# EAGLE board easyMySens-v024 (EAGLE 7.3.0)
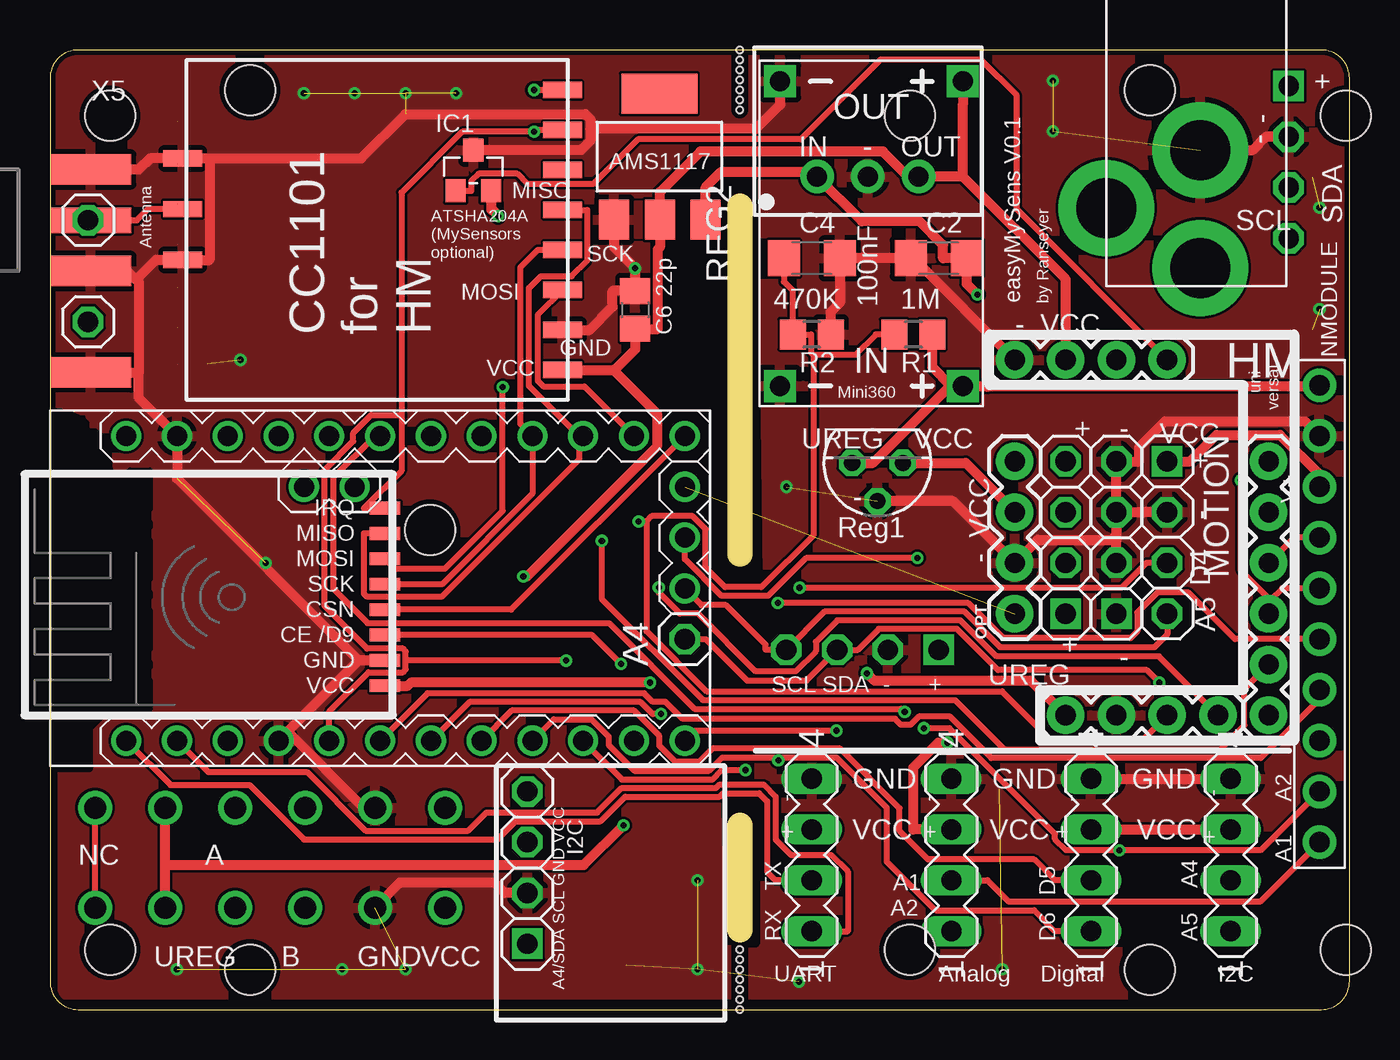
[diagram p0: board, top side]
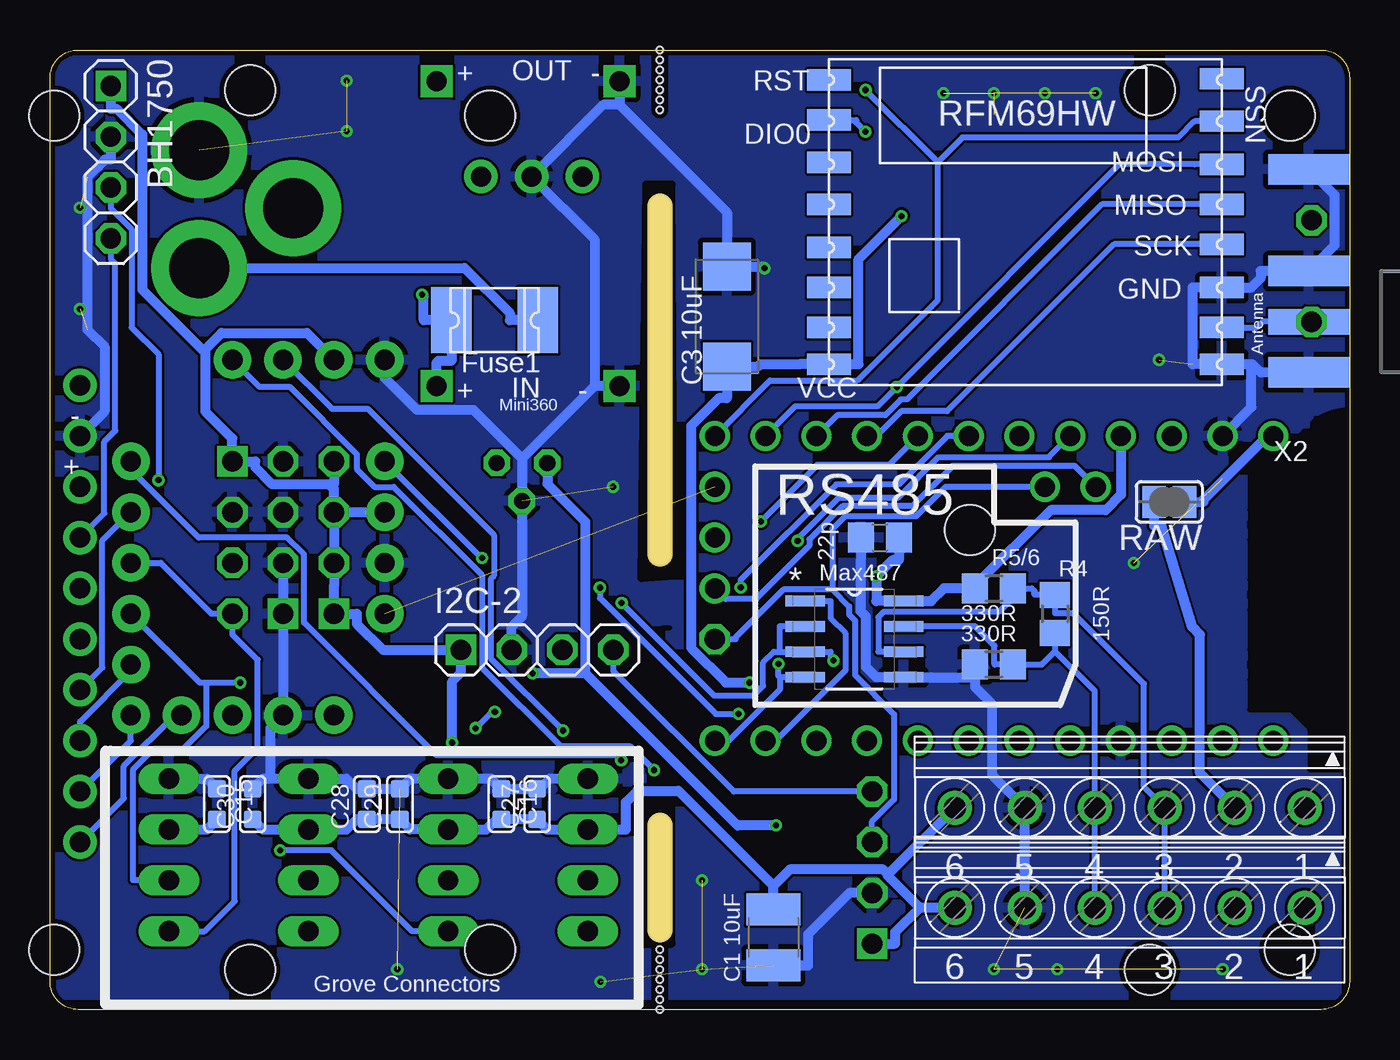
[diagram p1: board, bottom side, seen from below]

Size 65 x 48 mm. Coordinates in mm from the lower left corner, seen from the top.
Outline: 0,46.59 0,1.41 arc90 1.41,0 63.59,0 arc90 65,1.41 65,46.59 arc90 63.59,48 1.41,48 arc90 0,46.59
Copper layers (1*16): Top 0.035mm / dielectric 1.5mm / Bottom 0.035mm
Design rules "dirt_cheap_dirty_boards.v1": minimum track width 5mil, minimum drill 12mil, track to track 5mil, track to pad 5mil, pad to pad 5mil, via to via 5mil, smd to smd 0mil, copper to edge 10mil, drill to drill 10mil, minimum pad ring 10mil, minimum via ring 6mil, stop-mask expansion 2mil, vias tented up to drill 25mil, thermal gap 10mil
Net classes: 0 default: width 0.305 mm; 1 Power: width 0.508 mm
Holes 2.5 mm at 19,24 3,3 3,44.7 64.8,44.7 43,3 64.8,3 43,44.7 10,2 55,2 10,46 55,46
Holes 0.3 mm at 34.5,3 34.5,2.5 34.5,2 34.5,1.5 34.5,1 34.5,0.5 34.5,45 34.5,45.5 34.5,46 34.5,46.5 34.5,47 34.5,47.5 34.5,48 34.5,0
tRestrict: area 33.8,21.6 to 35.4,41.4; area 33.8,3.3 to 35.3,10.4; 18 lines
bRestrict: area 33.8,21.6 to 35.4,41.3; area 33.9,3.3 to 35.4,10.4; 17 lines
Milling: 2 lines

## Footprints (pad centres in the part's own frame; a part is rotated, then mirrored left to right if it is on the bottom)
MA04-1 = drill 1.016 long: 1 -3.81,0; 2 -1.27,0; 3 1.27,0; 4 3.81,0
1X01 = drill 1.016 octagon: 1 0,0
1X04-S = drill 1.016 square: 1 -3.81,0 | drill 1.016 octagon: 2 -1.27,0; 3 1.27,0; 4 3.81,0
SIP3 = drill 1 pad 1.676: 1 -2.54,0; 2 0,0; 3 2.54,0
C1210 = smd 1.6 x 2.7: 1 -1.4,0; 2 1.4,0
C1206 = smd 1.6 x 1.8: 1 -1.4,0; 2 1.4,0
SMC_C = smd 2.4 x 2.4: + -2.5,0; - 2.5,0
C0805 = smd 1.3 x 1.5: 1 -0.95,0; 2 0.95,0
C0603 = smd 0.889 x 0.889: 1 0,0.762; 2 0,-0.762
CC1101_MODULE1_SMD = smd 1.93 x 0.813: ANT 19,5.96; CSN 0,0; GDO0 0,2; GDO2 0,4; GND@0 0,12; GND@1 19,8.5; GND@2 19,3.42; MISO 0,6; MOSI 0,10; SCLK 0,8; VCC 0,14
1812L = smd 2.03 x 3.3: P$1 -2.16,0; P$2 2.16,0
1X04 = drill 1.016 pad 1.88: 1 0,0; 2 2.54,0; 3 5.08,0; 4 7.62,0
1X06 = drill 1.016 pad 1.88: 1 0,0; 2 2.54,0; 3 5.08,0; 4 7.62,0; 5 10.16,0; 6 12.7,0
SOT23 = smd 1.016 x 1.143: 1 -0.889,-1.016; 2 0.889,-1.016; 3 0,1.016
SOT223 = smd 1.499 x 2.007: 1 -2.261,-3.15; 2 0.025,-3.15; 3 2.311,-3.15 | smd 3.81 x 2.007: 4 0,3.15
ARDUINO-PRO-MINI#NP = drill 1: J2.1 -1.27,5.08; J2.2 -3.81,5.08; J3.1 15.24,0; J3.2 15.24,2.54; J3.3 15.24,5.08; J6.1 -12.7,7.62; J6.2 -10.16,7.62; J6.3 -7.62,7.62; J6.4 -5.08,7.62; J6.5 -2.54,7.62; J6.6 0,7.62; J6.7 2.54,7.62; J6.8 5.08,7.62; J6.9 7.62,7.62; J6.10 10.16,7.62; J6.11 12.7,7.62; J6.12 15.24,7.62; J7.1 15.24,-7.62; J7.2 12.7,-7.62; J7.3 10.16,-7.62; J7.4 7.62,-7.62; J7.5 5.08,-7.62; J7.6 2.54,-7.62; J7.7 0,-7.62; J7.8 -2.54,-7.62; J7.9 -5.08,-7.62; J7.10 -7.62,-7.62; J7.11 -10.16,-7.62; J7.12 -12.7,-7.62
NRF24L01+SMD = smd 0.635 x 1.524: CE -1.575,-7.861; CSN -0.305,-7.861; GND -2.845,-7.861; IRQ 4.775,-7.861; MISO 3.505,-7.861; MOSI 2.235,-7.861; SCK 0.965,-7.861; VCC -4.115,-7.861
DUPONT_10 = drill 1.016 pad 1.676: 1 1.27,1.27; 2 3.81,1.27; 3 6.35,1.27; 4 8.89,1.27; 5 11.43,1.27; 6 13.97,1.27; 7 16.51,1.27; 8 19.05,1.27; 9 21.59,1.27; 10 24.13,1.27
R0805 = smd 1.3 x 1.5: 1 -0.95,0; 2 0.95,0
SJ = smd 1.168 x 1.6: 1 -0.762,0; 2 0.762,0
TO92 = drill 0.813 octagon: 1 -1.27,0; 2 0,1.905; 3 1.27,0
DC-DC-STEP-DOWN-MP2307 = drill 1 pad 1.6 square: IN+ -7.62,-4.572; IN- -7.62,4.572; OUT+ 7.62,-4.572; OUT- 7.62,4.572
RFM = smd 2.184 x 1.067: ANT 19.651,2.889; DIO0 0,13.27; DIO1 0,11.143; DIO2 0,9.047; DIO3 0,6.889; DIO4 0,4.889; DIO5 0,2.889; GNDA 19.651,4.889; GNDB 19.651,1.048; MISO 19.651,9.047; MOSI 19.651,11.047; NC 19.651,15.334; NSS 19.651,13.206; RESET 0,15.27; SCK 19.651,7.048; VCC 0,1.048
SOIC127P600X175-8N = smd 1.981 x 0.533: 1 -2.464,1.905; 2 -2.464,0.635; 3 -2.464,-0.635; 4 -2.464,-1.905; 5 2.464,-1.905; 6 2.464,-0.635; 7 2.464,0.635; 8 2.464,1.905
PJ-102A = drill 3 pad 4.8: RING 0.1,-3.39; RING_SW -4.6,-6.29; TIP 0.1,-9.29
1751280 = drill 1.1 pad 1.7: 1 -8.75,-0.1; 2 -5.25,-0.1; 3 -1.75,-0.1; 4 1.75,-0.1; 5 5.25,-0.1; 6 8.75,-0.1
SMA_EDGELAUNCH = smd 4.064 x 1.524: GND@1 2.032,-2.54; GND@2 2.032,2.54 | smd 4.064 x 1.524 bottom: GND@3 2.032,2.54; GND@4 2.032,-2.54 | smd 4.064 x 1.27: P 2.032,0

## Placement (x,y rotation side)
A0  DIP Grove  [MA04-1]  45.09,7.73 90 top
A4  [1X01]  31.75,18.53 90 top
ANT  [1X01]  1.91,39.48 0 top
ANT1  [1X01]  1.91,34.41 0 top
BH1750  [1X04-S]  61.96,42.39 270 bottom
BOOST  R-78C1.8-1.0  [SIP3]  40.91,41.67 0 top
C1  10uF  [C1210]  28.81,3.6 270 bottom
C2  0.1uF  [C1206]  44.45,37.58 180 top
C3  10uF  [SMC_C]  31.14,34.67 90 bottom
C4  0,1uF  [C1206]  38.1,37.58 180 top
C6  22pF  [C0805]  29.27,35 270 top
C10  22p  [C0805]  23.5,23.61 0 bottom
C15  10uF  [C0603]  56.64,10.27 0 bottom
C16  100nF  [C0603]  42.42,10.27 0 bottom
C27  10uF  [C0603]  40.64,10.27 180 bottom
C28  100nF  [C0603]  49.15,10.27 180 bottom
C29  10uF  [C0603]  47.5,10.27 180 bottom
C30  100nF  [C0603]  54.86,10.27 180 bottom
CC0  CC1101  [CC1101_MODULE1_SMD]  25.64,46 180 top
D7  DIP Grove  [MA04-1]  52.07,7.73 90 top
F1  1812L  [1812L]  42.76,34.48 0 bottom
HM1  [1X04]  50.8,14.72 0 top
HM2  [1X06]  60.96,14.72 90 top
HM3  [1X04]  48.26,32.5 0 top
I2C-1  [1X04-S]  23.88,7.1 90 top
I2C-2  [1X04-S]  40.64,17.99 0 bottom
I2C.  DIP Grove  [MA04-1]  59.05,7.73 90 top
IC1  ATSHA204A  [SOT23]  21.18,41.97 0 top
IC2  REG1117  [SOT223]  30.48,42.66 0 top
JP1  [1X04-S]  53.34,23.61 90 top
JP3  [1X04-S]  50.8,23.61 90 top
M1  ARDUINO-PRO-MINI-3.3V#NP  [ARDUINO-PRO-MINI#NP]  16.51,21.07 0 top
M2  NRF24L01+SMD  [NRF24L01+SMD]  8.89,20.31 90 top
MOTION  [1X04-S]  55.88,23.61 270 top
NMODULE  CONNECTOR_10DUPONT  [DUPONT_10]  64.77,7.1 90 top
OPT  [1X04]  48.26,19.8 90 top
R1  1M  [R0805]  43.18,33.77 180 top
R2  470K  [R0805]  38.1,33.77 180 top
R4  150R  [R0805]  14.73,19.8 270 bottom
R5  330R  [R0805]  17.78,21.07 0 bottom
R6  330R  [R0805]  17.78,17.26 180 bottom
RAW  [SJ]  9.02,25.39 180 bottom
REG1  LP2950Z  [TO92]  41.39,27.34 180 top
REG2  STEP-DWN-MP2307  [DC-DC-STEP-DOWN-MP2307]  41.09,38.81 90 top
RFM69W  RFM69HW  [RFM]  26.04,31.23 0 bottom
RS485  MAX487ECSA+  [SOIC127P600X175-8N]  24.77,18.53 0 bottom
U$3  2.1MMJACKTHM  [PJ-102A]  57.44,46.39 0 top
UART  DIP Grove  [MA04-1]  38.1,7.73 90 top
X1  1751280  [1751280]  11,10 180 bottom
X2  [SMA_EDGELAUNCH]  0,34.41 180 bottom
X3  1751280  [1751280]  11,5 180 bottom
X5  [SMA_EDGELAUNCH]  0,39.48 0 top

## Library data of the parts
A0 D7 I2C. UART = con-lstb; OC_FARNELL: unknown; OC_NEWARK: unknown
A4 ANT ANT1 = pinhead
BH1750 I2C-1 I2C-2 JP1 JP3 MOTION = pinhead-2
BOOST = dc-dc-converter
C1-C4 C6 C10 R1 R2 R4-R6 = rcl
C15 C16 C27-C30 = Discrete-new
CC0 M2 = wireless
F1 = ptc-littlefuse
HM1 HM3 OPT = SparkFun-Connectors; PROD_ID: CONN-09696
HM2 = SparkFun-Connectors; PROD_ID: CONN-08437
IC1 = Sensor
IC2 = burr-brown; MPN: REG1117; OC_FARNELL: 1097566; OC_NEWARK: 14P6981
M1 REG2 = diy-modules
NMODULE = TD-MySensors
RAW = jumper
REG1 = linear
RFM69W = hoperf
RS485 = Maxim_By_element14_Batch_1; MPN: MAX487ECSA+; OC_FARNELL: 9724532; OC_NEWARK: 68K4803; PACKAGE: SOIC-8; SUPPLIER: Maxim
U$3 X2 X5 = adafruit
X1 X3 = con-phoenix-350; MPN: 1751280; OC_FARNELL: unknown; OC_NEWARK: 27R1765

## Nets
3.3V [Power]: C3.+ IC1.2 M2.VCC RFM69W.VCC
A: R4.1 R5.2 RS485.6 X1.3 X3.3
A0: C4.2 HM1.3 M1.J6.8 R1.2 R2.2
A1: A0.2 HM1.4 M1.J6.7 NMODULE.1
A2: A0.1 HM2.1 M1.J6.6 NMODULE.2
A3: HM2.2 M1.J6.5 NMODULE.3
A4: A4.1 BH1750.3 HM2.3 I2C-1.3 I2C-2.3 I2C..2 M1.J2.1 NMODULE.6
A5: BH1750.4 HM2.4 I2C-1.4 I2C-2.4 I2C..1 M1.J2.2 M1.J3.1 MOTION.4 NMODULE.7
A6: M1.J3.2 OPT.4
A7: M1.J3.3 OPT.1
ANT0: ANT.1 CC0.ANT X5.P
ATSHA_D7: HM3.4 IC1.1 M1.J7.3
B: R4.2 R6.1 RS485.7 X1.4 X3.4
CSN: CC0.CSN M1.J6.12 M2.CSN RFM69W.NSS
D3: HM2.5 M1.J7.7 NMODULE.4
D4: M1.J7.6 MOTION.3
D5: D7.2 M1.J7.5
D6: D7.1 HM2.6 M1.J7.4
D8: M1.J7.2 RS485.1
D9: HM3.3 M1.J7.1 M2.CE RS485.4
FREE: X1.1 X3.1
GND [Power]: A0.4 BH1750.2 BOOST.2 C1.2 C2.2 C3.- C4.1 C6.1 C10.1 C15.1 C16.1 C27.2 C28.2 C29.2 C30.2 CC0.GND@0 CC0.GND@1 CC0.GND@2 D7.4 HM1.2 HM3.1 I2C-1.2 I2C-2.2 I2C..4 IC1.3 IC2.1 JP1.1 JP1.2 JP1.3 JP1.4 M1.J6.2 M1.J7.9 M2.GND MOTION.2 NMODULE.9 OPT.2 R2.1 R6.2 REG1.2 REG2.IN- REG2.OUT- RFM69W.GNDA RFM69W.GNDB RS485.5 U$3.RING UART.4 X1.5 X2.GND@1 X2.GND@2 X2.GND@3 X2.GND@4 X3.5 X5.GND@1 X5.GND@2 X5.GND@3 X5.GND@4
IN [Power]: F1.P$2 U$3.TIP
IRQ: CC0.GDO0 M1.J7.8 M2.IRQ NMODULE.5 RFM69W.DIO0 RS485.2 RS485.3
MISO: CC0.MISO M1.J6.10 M2.MISO RFM69W.MISO
MOSI: CC0.MOSI M1.J6.11 M2.MOSI RFM69W.MOSI
N$16: ANT1.1 RFM69W.ANT X2.P
RAW [Power]: M1.J6.1 RAW.1
RESET: M1.J7.10
RX: M1.J7.11 UART.1
SCK: CC0.SCLK M1.J6.9 M2.SCK RFM69W.SCK
TX: M1.J7.12 UART.2
UREG [Power]: BOOST.1 C2.1 F1.P$1 HM1.1 IC2.3 NMODULE.10 R1.1 RAW.2 REG1.3 REG2.IN+ X1.2 X3.2
VCC [Power]: A0.3 BH1750.1 BOOST.3 C1.1 C6.2 C10.2 C15.2 C16.2 C27.1 C28.1 C29.1 C30.1 CC0.VCC D7.3 HM3.2 I2C-1.1 I2C-2.1 I2C..3 IC2.2 JP3.1 JP3.2 JP3.3 JP3.4 M1.J6.4 MOTION.1 NMODULE.8 OPT.3 R5.1 REG1.1 REG2.OUT+ RS485.8 UART.3 X1.6 X3.6

## Tracks (layer width: path | path; a pad name or v marks a point on that pad's centre or on a via)
3.3V  (via drill 0.3 pad 0.61)
  Top 0.508: v30.02,16.35 18.05,16.35 17.89,16.19 M2.VCC | IC1.2 22.06,40.01 22.11,40.01 v22.42,39.69
  Bottom 0.508: v30.02,16.35 31.2,16.35 32.94,18.09 32.94,29.19 31.54,30.59 31.14,30.59 C3.+ 29.56,32.17 29.45,32.28 27.51,32.28 26.61,32.28 RFM69W.VCC 24.56,32.28 24.56,37.55 v22.42,39.69
A
  Bottom 0.305: RS485.6 23.57,17.9 23.57,19.62 23.31,19.89 17.55,19.89 16.36,21.07 | 16.36,21.07 15.9,21.07 15.76,20.93 15.76,20.75 R4.1 14.73,19.82 13.8,19.82 10.28,16.3 10.28,11.13 X1.3 X3.3 | R5.2 16.36,21.07
A0  (via drill 0.3 pad 0.61)
  Top 0.305: 29.83,24.42 29.83,18.92 32.84,15.91 47.62,15.91 50.03,13.5 54.66,13.5 HM1.3 | 29.83,24.42 v29.45,24.42 | 38.18,32.74 38.18,23.72 35.59,21.13 33.77,21.13 32.8,22.1 32.8,24.03 32.14,24.68 30.1,24.68 29.83,24.42 | 38.18,32.74 38.08,32.84 38.08,33.77 R2.2 37.15,35.95 36.7,36.4 C4.2 | 38.18,32.74 40.27,32.74 41.3,33.77 R1.2
  Bottom 0.305: M1.J6.8 23.04,27.24 26.62,27.24 v29.45,24.42
A1  (via drill 0.3 pad 0.61)
  Top 0.305: HM1.4 55.47,17.67 47.34,17.67 45.54,19.47 39.38,19.47 38.3,18.4 38.3,17.92 37.3,16.91 35.3,16.91 32.41,19.8 31.5,19.8 30.45,20.85 v30.45,21.12 | A0.2 46.89,6.47 47.95,5.4 60.53,5.4 NMODULE.1
  Bottom 0.305: NMODULE.1 61.31,10.56 61.31,12.18 58.76,14.72 HM1.4 | M1.J6.7 20.12,28.69 22.54,26.27 25.67,26.27 30.45,21.48 v30.45,21.12
A2  (via drill 0.3 pad 0.61)
  Top 0.305: M1.J6.6 16.25,28.69 14.17,26.6 14.17,21.05 15.89,19.33 27.96,19.33 32.24,15.05 42.59,15.05 v42.75,14.89 | v43.71,14.07 44.99,14.07 50.27,8.79 50.27,8.52 50.83,7.96 v53.49,7.96 60.55,7.96 NMODULE.2
  Bottom 0.305: v43.71,14.07 42.95,14.83 42.8,14.83 v42.75,14.89 | v53.49,7.96 50.93,7.96 46.89,3.92 A0.1 | NMODULE.2 60.96,13.45 HM2.1
A3  (via drill 0.3 pad 0.61)
  Top 0.305: v27.6,23.45 27.6,20.54 32.66,15.48 45.26,15.48 47.73,13.02 58.53,13.02 59.74,14.23 59.74,16.04 HM2.2
  Bottom 0.305: v27.6,23.45 27.6,23.55 25.54,25.61 22.57,25.61 20.56,27.63 15.03,27.63 M1.J6.5 | NMODULE.3 63.5,14.39 60.96,16.93 HM2.2
A4  (via drill 0.3 pad 0.61)
  Top 0.305: v55.49,16.35 54.86,16.98 47.42,16.98 45.36,19.04 41.46,19.04 40.41,17.99 I2C-2.3 37.84,16.46 34.86,16.46 32.79,18.53 A4.1 | 61.04,20.49 59.57,21.95 v59.57,26.48 | NMODULE.6 61.63,21.07 61.04,20.49 | 61.04,20.49 61.04,19.88 HM2.3
  Bottom 0.305: 57.18,16.35 57.18,14.18 58.33,13.02 59.81,13.02 60.86,11.98 60.86,6.47 I2C..2 | HM2.3 57.51,16.35 57.18,16.35 | 57.18,16.35 | 57.18,16.35 v55.49,16.35 | v59.57,26.48 59.57,32.78 60.92,34.12 60.92,39.04 61.96,40.08 BH1750.3 | 25.87,21.01 25.03,20.17 25.03,19.75 24.74,19.45 24.74,16.73 22.78,14.77 22.78,10.51 23.88,9.41 I2C-1.3 | M1.J2.1 20.2,26.15 21.69,24.66 25.25,24.66 25.87,24.04 25.87,21.01 | 25.87,21.01 28.32,21.01 30.71,18.62 30.71,18.53 A4.1
A5
  Top 0.305: M1.J3.1 32.58,20.24 33.8,20.24 35.79,18.25 35.79,17.99 I2C-2.4 38.74,19.9 45.75,19.9 47.53,18.12 55.25,18.12 55.88,18.76 MOTION.4 | NMODULE.7 62.23,23.61 HM2.4
  Bottom 0.305: I2C..1 57.25,3.92 55.75,5.42 55.75,11.94 54.61,13.09 54.61,17.49 55.88,18.76 MOTION.4 56.92,19.8 59.46,22.34 HM2.4 | M1.J2.2 13.74,27.2 19.85,27.2 21.86,25.18 25.36,25.18 27.01,23.52 27.01,23.2 29.68,20.53 31.21,20.53 M1.J3.1 | I2C-1.4 30.79,10.91 36.83,16.95 I2C-2.4 | BH1750.4 61.96,37.54 61.73,37.31 61.73,28.95 62.28,28.41 62.28,24.83 NMODULE.7
A6  (via drill 0.3 pad 0.61)
  Top 0.305: v43.39,22.59 37.81,22.59 35.92,20.69 33.59,20.69 31.75,22.53 M1.J3.2
  Bottom 0.305: OPT.4 43.42,22.59 v43.39,22.59
A7  (1 unrouted)
ANT0
  Top 0.305: ANT.1 X5.P 4.34,39.48 4.9,40.04 CC0.ANT
ATSHA_D7  (via drill 0.3 pad 0.61)
  Top 0.305: M1.J7.3 28.61,11.51 33.13,11.51 33.6,11.98 v34.79,11.98 | IC1.1 21.07,40.96 21.07,41.45 21.43,41.81 23.38,41.81 23.9,41.3 27.17,41.3 29.4,43.53 37.56,43.53 41.55,47.52 46.57,47.52 48.35,45.73 48.35,40.03 HM3.4
  Bottom 0.305: HM3.4 54.53,31.16 53.02,31.16 49.65,27.78 49.65,27.04 48.77,26.15 47.81,26.15 43.39,21.73 43.39,17.1 39.47,13.18 35.99,13.18 v34.79,11.98
B
  Bottom 0.305: RS485.7 18.73,19.16 17.76,18.19 17.76,17.26 R6.1 15.39,17.26 14.73,17.92 | R4.2 14.73,17.92 | 14.73,17.92 12.75,15.94 X1.4 X3.4
CSN  (via drill 0.3 pad 0.61)  (1 unrouted)
  Top 0.305: M1.J6.12 23.06,20 M2.CSN | v24.2,46 24.39,46 CC0.CSN
  Bottom 0.305: 20.6,42.39 v24.2,46 | M1.J6.12 28.98,31.47 24.62,31.47 20.6,35.49 20.6,42.39 | 20.6,42.39 19.37,43.62 8.57,43.62 7.75,44.44 RFM69W.NSS
D3
  Top 0.305: NMODULE.4 63.5,15.53 60.55,12.59 47.08,12.59 45.01,14.66 43.45,14.66 43.04,14.25 42.56,14.25 42.27,14.54 31.64,14.54 30.78,15.4 30.14,15.4 29.72,15.82 18.88,15.82 M1.J7.7
  Bottom 0.305: NMODULE.4 62.38,17.11 62.38,23.46 HM2.5
D4  (via drill 0.3 pad 0.61)
  Top 0.305: v30.56,14.78 30.15,14.78 29.54,15.39 20.99,15.39 M1.J7.6 | v37.5,21.1 53.6,21.1 54.84,22.34 MOTION.3
  Bottom 0.305: v37.5,21.1 37.5,20.58 31.7,14.78 v30.56,14.78
D5
  Top 0.305: M1.J7.5 23.09,14.95 29.21,14.95 30.48,13.69 30.48,13.19 31.3,12.38 32.47,12.38 33.15,13.05 39.51,13.05 42.49,10.07 42.49,8.94 43.92,7.51 49.23,7.51 50.27,6.47 D7.2
D6  (via drill 0.3 pad 0.61)
  Top 0.305: 36.43,12.61 39.34,12.61 41.85,10.1 41.85,7.41 44.29,4.97 49.23,4.97 50.27,3.92 D7.1 | M1.J7.4 25.2,14.52 27.09,14.52 27.94,13.66 27.94,13.23 29.23,11.94 32.95,11.94 33.62,12.61 36.43,12.61 | 36.43,12.61 v36.43,12.47
  Bottom 0.305: v36.43,12.47 36.68,12.72 45.66,12.72 52.3,19.35 52.3,22.78 53.13,23.61 57.56,23.61 60.96,27.01 HM2.6
D8
  Bottom 0.305: RS485.1 25.96,20.44 25.96,19.57 25.22,18.84 25.22,16.95 28.72,13.45 M1.J7.2
D9  (via drill 0.3 pad 0.61)
  Top 0.305: v28.57,17.29 27.12,18.73 M2.CE | M1.J7.1 32.25,13.95 v39.34,13.95
  Bottom 0.305: 28.5,16.62 28.57,16.7 v28.57,17.29 | 28.5,16.62 28.5,16.01 31.06,13.45 M1.J7.1 | HM3.3 50.9,30.06 49.12,30.06 42.8,23.74 42.8,21.69 42.96,21.53 42.96,17.56 v39.34,13.95 | RS485.4 28.5,16.62
FREE
  Top 0.305: X3.1 X1.1
GND  (via drill 0.3, 0.3 pad 0.61)  (20 unrouted)
  Top 0.508: HM3.1 43.18,37.58 C2.2 C4.1 39.5,35.35 39.05,34.9 R2.1 | NMODULE.9 62.76,29.43 55.78,29.43 54.48,28.13 54.48,27.42 JP1.4 JP1.3 | 27.03,44.06 27.03,43.46 26.57,42.99 IC1.3 | 7.98,42.58 15.57,42.58 17.78,44.79 26.78,44.79 27.03,44.54 27.03,44.06 | 27.03,44.06 35.32,44.06 36.51,45.25 REG2.OUT- | 7.98,42.58 7.82,42.58 CC0.GND@2 5,42.58 4.45,42.03 X5.GND@3 | 7.98,42.58 7.98,37.5 CC0.GND@1 5.29,37.5 4.31,36.52 | 4.31,36.52 4.45,36.38 4.45,31.87 | 4.31,36.52 4.29,36.52 3.86,36.94 X5.GND@4 | 4.45,31.87 4.45,30.59 M1.J6.2 6.35,26.56 15.45,17.47 | X2.GND@3 4.45,31.87 | BH1750.2 60.82,43.66 60.16,43 U$3.RING | JP1.3 54.74,24.88 MOTION.2 | CC0.GND@0 26.98,34 28.14,35.16 28.14,35.95 C6.1 v29.27,37.08 28.22,38.13 IC2.1 | 11.88,13.91 M1.J7.9 | 15.45,17.47 11.88,13.91 | X1.5 15.69,10.1 11.88,13.91 | 15.45,17.47 15.45,17.46 15.92,17.46 M2.GND | I2C-1.2 22.73,5.83 22.21,6.35 17.5,6.35 X3.5 | D7.4 I2C..4 | JP1.3 53.34,23.74 53.26,23.65 53.26,23.49 | JP1.2 53.34,23.48 53.26,23.48 53.26,23.49 | 53.26,23.49 49.41,23.49 OPT.2 45.16,25.44 REG1.2
  Bottom 0.508: 46.99,11.55 A0.4 42.93,11.55 C16.1 C27.2 40.51,11.04 40.01,11.55 UART.4 | 46.99,11.55 C29.2 C28.2 49.66,11.04 50.16,11.55 D7.4 53.98,11.55 | 46.99,11.55 | 37.76,31.2 37.76,38.53 BOOST.2 37.33,45.25 36.51,45.25 | 37.76,31.2 41.39,27.57 | REG2.IN- 37.76,31.2 | I2C..4 57.15,11.55 | 57.15,11.55 | 57.15,11.55 C15.1 | 41.39,27.57 REG1.2 41.39,24.39 41.39,19.65 41.91,19.13 I2C-2.2 | HM3.1 48.26,31.61 46.66,30.01 43.83,30.01 41.39,27.57 | BH1750.2 61.96,42.52 62.25,42.52 63.13,41.63 63.13,34.01 62.27,33.15 62.27,29.92 NMODULE.9 | 36.51,45.25 31.14,39.89 C3.- 29.36,37.17 v29.27,37.08 | 36.51,45.25 36.51,45.71 REG2.OUT- | X5.GND@3 0.76,40.75 0.76,38.22 X5.GND@4 4.45,36.94 4.45,36.58 4.91,36.12 RFM69W.GNDA 7.86,36.12 7.86,32.28 RFM69W.GNDB 4.91,32.28 | 53.98,11.55 54.36,11.55 C30.2 | 53.98,11.55 53.98,14.09 HM1.2 JP1.1 JP1.2 | 18.73,16.62 20.93,16.62 RS485.5 22.95,16.62 23.67,16.62 24.19,17.14 24.19,19.66 24.45,19.92 24.45,22.48 C10.1 | C1.2 27.08,2.2 27.08,3.77 25.02,5.83 I2C-1.2 | 18.73,16.62 18.73,16.13 17.86,15.26 17.86,11.71 X1.5 X3.5 | R6.2 18.73,16.62 | 4.91,32.28 4.86,32.28 4.45,31.87 X2.GND@3 | M1.J6.2 4.91,30.13 4.91,32.28
  other vias: 12.7,45.83 15.24,45.83 17.78,45.83 20.32,45.83 9.53,32.5 10.79,22.34 6.35,2.02 14.61,2.02 17.78,2.02 32.38,2.02 32.38,6.47 37.47,1.38 47.62,2.02 36.83,26.15 50.16,46.47 50.16,43.93 63.5,40.12 63.5,35.04
  pour Bottom: 0.64,0.75 0.64,12.18 3.17,14.72 5.08,14.72 5.08,26.78 3.17,26.78 1.91,29.96 0,29.96 0,46.47 1.27,47.74 64.77,47.74 65.41,0.75
  pour Top: 0.64,0.75 0.64,12.18 3.17,14.72 5.08,14.72 5.08,26.78 3.17,26.78 1.91,29.96 0,29.96 0,46.47 1.27,47.74 64.77,47.74 65.41,0.75
IN
  Bottom 0.508: F1.P$2 41.99,34.48 41.99,34.83 44.26,37.1 U$3.TIP
IRQ  (via drill 0.3 pad 0.61)
  Top 0.305: NMODULE.5 59.27,18.53 56.95,20.86 55.38,20.86 54.38,19.86 54.38,18.9 54.06,18.58 47.68,18.58 45.93,20.34 v36.4,20.34 | 17.8,17.45 17.8,17.91 17.65,18.06 15.86,18.06 13.73,20.19 13.73,26.99 15.17,28.43 15.17,28.85 16.06,29.74 17.58,29.74 | M1.J7.8 13.97,14.9 15.94,16.87 17.65,16.87 17.8,17.01 17.8,17.45 | v25.81,17.45 17.8,17.45 | 17.58,29.74 17.58,26.95 15.71,25.08 M2.IRQ | 17.58,29.74 17.58,40.87 20.61,43.91 v24.22,43.91 24.3,43.91 24.39,44 CC0.GDO0
  Bottom 0.305: v36.4,20.34 31.78,15.71 29.81,15.71 29.33,16.19 29.33,17.35 28.79,17.9 28.5,17.9 | v25.81,17.45 25.96,17.61 25.96,17.9 RS485.3 28.5,17.9 | 28.5,17.9 28.5,19.16 RS485.2 | RFM69W.DIO0 24.66,44.5 24.66,44.35 v24.22,43.91
MISO  (1 unrouted)
  Top 0.305: 26.46,28.69 26.46,27.52 19.58,20.64 15.86,20.64 15.71,20.79 15.71,23.81 M2.MISO | 26.46,28.69 23.96,31.19 23.96,36.09 24.55,36.69 26.1,36.69 26.88,37.47 26.88,40 CC0.MISO | M1.J6.10 26.46,28.69
  Bottom 0.305: RFM69W.MISO 12.38,40.28 22.14,30.52 22.45,30.52 23.22,29.74 25.62,29.74 M1.J6.10
MOSI  (via drill 0.3 pad 0.61)  (1 unrouted)
  Top 0.305: M2.MOSI 17.24,22.06 19.76,22.06 22.65,24.94 v22.65,31.14 | CC0.MOSI 24.39,34.75 24.39,31.46 24.68,31.17 26.73,31.17 M1.J6.11
  Bottom 0.305: M1.J6.11 27.73,30.17 23.62,30.17 v22.65,31.14 11.51,42.28 7.75,42.28 RFM69W.MOSI
N$16  (1 unrouted)
  Bottom 0.305: ANT1.1 X2.P 4.34,34.41 4.63,34.12 RFM69W.ANT
RAW
  Bottom 0.508: RAW.1 7.29,25.39 7.29,25.51 4.11,28.69 M1.J6.1
RX
  Top 0.305: M1.J7.11 7.91,11.89 12.86,11.89 15.8,8.94 20.92,8.94 21.83,9.86 27.37,9.86 28.59,11.08 33.31,11.08 33.49,11.26 35.7,11.26 36.3,10.66 36.3,8.51 37.07,7.73 39.07,7.73 39.9,6.9 39.9,3.92 UART.1
SCK  (1 unrouted)
  Top 0.305: M2.SCK 19.6,21.27 24.13,25.8 M1.J6.9 23.53,29.29 23.53,37.14 24.39,38 CC0.SCLK
  Bottom 0.305: RFM69W.SCK 11.79,38.28 20.13,29.93 22.42,29.93 23.66,28.69 M1.J6.9
TX
  Top 0.305: M1.J7.12 6.03,11.23 9.98,11.23 12.7,8.51 22.38,8.51 23.29,9.42 27.55,9.42 28.77,10.65 33.49,10.65 33.67,10.82 35.47,10.82 35.87,10.42 35.87,6.9 36.3,6.47 UART.2
UREG  (via drill 0.3 pad 0.61)
  Top 0.508: HM1.1 49.07,16.45 41.25,16.45 v40.87,16.82 | 5.75,7.23 X1.2 | X3.2 5.75,7.23 | 5.75,7.23 26.7,7.23 v28.68,9.21 | v46.38,35.77 45.85,36.3 C2.1 44.67,37.58 44.67,38.24 43.48,39.43 40.61,39.43 BOOST.1 38.14,41.9 33.57,41.9 32.79,41.13 IC2.3 | REG1.3 41.16,27.34 45.02,31.2 45.07,31.2 | 45.07,31.2 44.13,32.13 R1.1 | 45.07,31.2 REG2.IN+ 46.84,31.2 46.88,31.15 63.42,31.15 NMODULE.10
  Bottom 0.508: 38.22,16.82 38.22,24.4 40.12,26.3 REG1.3 | v28.68,9.21 30.61,9.21 38.22,16.82 | 38.22,16.82 v40.87,16.82 | RAW.2 9.78,24.21 9.42,24.21 7.87,19.13 7.49,18.74 7.49,11.84 X1.2 | REG2.IN+ 45.66,32.38 45.59,32.45 44.91,32.45 F1.P$1 46.31,34.48 46.31,35.69 v46.38,35.77
VCC  (via drill 0.3 pad 0.61)
  Top 0.508: A0.3 43.18,9.01 43.18,12.11 44.42,13.35 v44.88,13.35 | D7.3 I2C..3 | 45.66,41.67 BOOST.3 42.91,41.67 41.66,42.92 32.53,42.92 30.5,40.89 IC2.2 30.5,38.13 30.4,38.02 30.4,34.05 C6.2 29.27,33.02 28.21,31.96 | MOTION.1 57.02,27.42 58.35,28.74 61.52,28.74 63.5,26.76 NMODULE.8 | 28.21,31.96 30.35,29.81 30.35,28.15 23.86,21.67 v23.67,21.67 | CC0.VCC 28.16,32 28.21,31.96 | HM3.2 50.8,36.53 45.66,41.67 | 45.66,41.67 45.66,45.25 REG2.OUT+ | REG1.1 45.8,27.34 OPT.3
  Bottom 0.508: I2C..3 57.15,9.01 | 57.15,9.01 | 57.15,9.01 C15.2 | v44.88,13.35 44.88,16.41 44.45,16.85 I2C-2.1 48.35,17.99 49.66,19.3 49.66,19.8 JP3.1 50.8,21.2 JP3.2 JP3.3 | JP3.3 OPT.3 | JP3.3 50.8,26.05 50.91,26.16 | 28.81,6.19 33.57,10.94 35.62,10.94 36.2,10.36 36.2,9.01 UART.3 40.13,9.01 C27.1 C16.2 42.67,9.51 43.18,9.01 A0.3 46.99,9.01 C29.1 | C1.1 28.81,6.19 | 23.09,6.76 23.33,7.01 27.99,7.01 28.81,6.19 | 23.09,6.76 X1.6 | 21.5,5.1 23.09,6.69 23.09,6.76 | C10.2 22.55,22.48 22.86,22.48 v23.67,21.67 23.67,20.44 RS485.8 20.93,20.44 20.29,21.07 19.76,21.07 R5.1 18.73,21.2 14.95,24.98 12.2,24.98 11.43,25.75 M1.J6.4 | C29.1 C28.1 49.66,9.51 50.16,9.01 D7.3 54.36,9.01 C30.1 | C29.1 | 57.23,33.02 57.23,29.92 55.88,28.56 MOTION.1 54.74,27.42 54.74,27.13 53.88,26.27 51.03,26.27 50.91,26.16 | X3.6 21.5,5.1 | 21.5,5.1 22.73,3.86 22.73,3.29 I2C-1.1 | BH1750.1 61.96,45.06 61.67,45.06 60.38,43.77 60.38,36.01 57.4,33.02 57.23,33.02 | 50.91,26.16 50.8,26.28 JP3.4 | 57.23,33.02 56.41,33.84 52.14,33.84 HM3.2

## Text on the board
tPlace: easyMySens V0.1 | by Ranseyer | HM | uni- / versal
tOrigins: G3 | G1 | G1 | G3 | G2 | G1 | G1 | G3 | G3 | Gehäuse 1: Box2252 / Geh2: 59x65 / Gehäuse 3: 67x98
tNames: + | - | IN | - | OUT | - | AMS1117 | SDA | MISO | C4 | C2 | SCL | Antenna | ATSHA204A / (MySensors / optional) | SCK | MOSI | 22p | 470K | 100nF | 1M | CC1101 / for / HM | GND | C6 | - | VCC | VCC | R2 | R1 | Mini360 | + | - | UREG | VCC | VCC | + | V+ | IRQ | - | MISO | Reg1 | VCC | - | MOSI | SCK | - | D4 | CSN | CE /D9 | + | A5 | GND | - | VCC | UREG | SCL | SDA | - | + | GND | GND | GND | - | - | - | - | A2 | I2C | + | VCC | + | VCC | + | VCC | + | NC | A | A1 | TX | A1 | D5 | A4 | A2 | RX | D6 | A5 | UREG | B | GND | VCC | A4/SDA SCL GND VCC | UART | Analog | Digital | I2C
bNames: - | + | RST | OUT | DIO0 | NSS | MOSI | MISO | SCK | GND | Antenna | VCC | Fuse1 | C3 10uF | - | IN | + | Mini360 | - | + | R4 | R5/6 | 22p | 150R | Max487 | 330R | 330R | C1 10uF | Grove Connectors
Milling: Please include the cutouts...